# Altium PCB MainPCB.PcbDoc (part 2 of 2)
Units mil, origin at the board's own origin, x right, y up, seen from the top; angles counter-clockwise.
Board outline 4763.78 x 5931.1 mil, 2 copper layers (Top Layer, Bottom Layer); 67 components, 107 nets, 776 pads, 24 vias.
Unrouted connection lines stored in the file: 21.
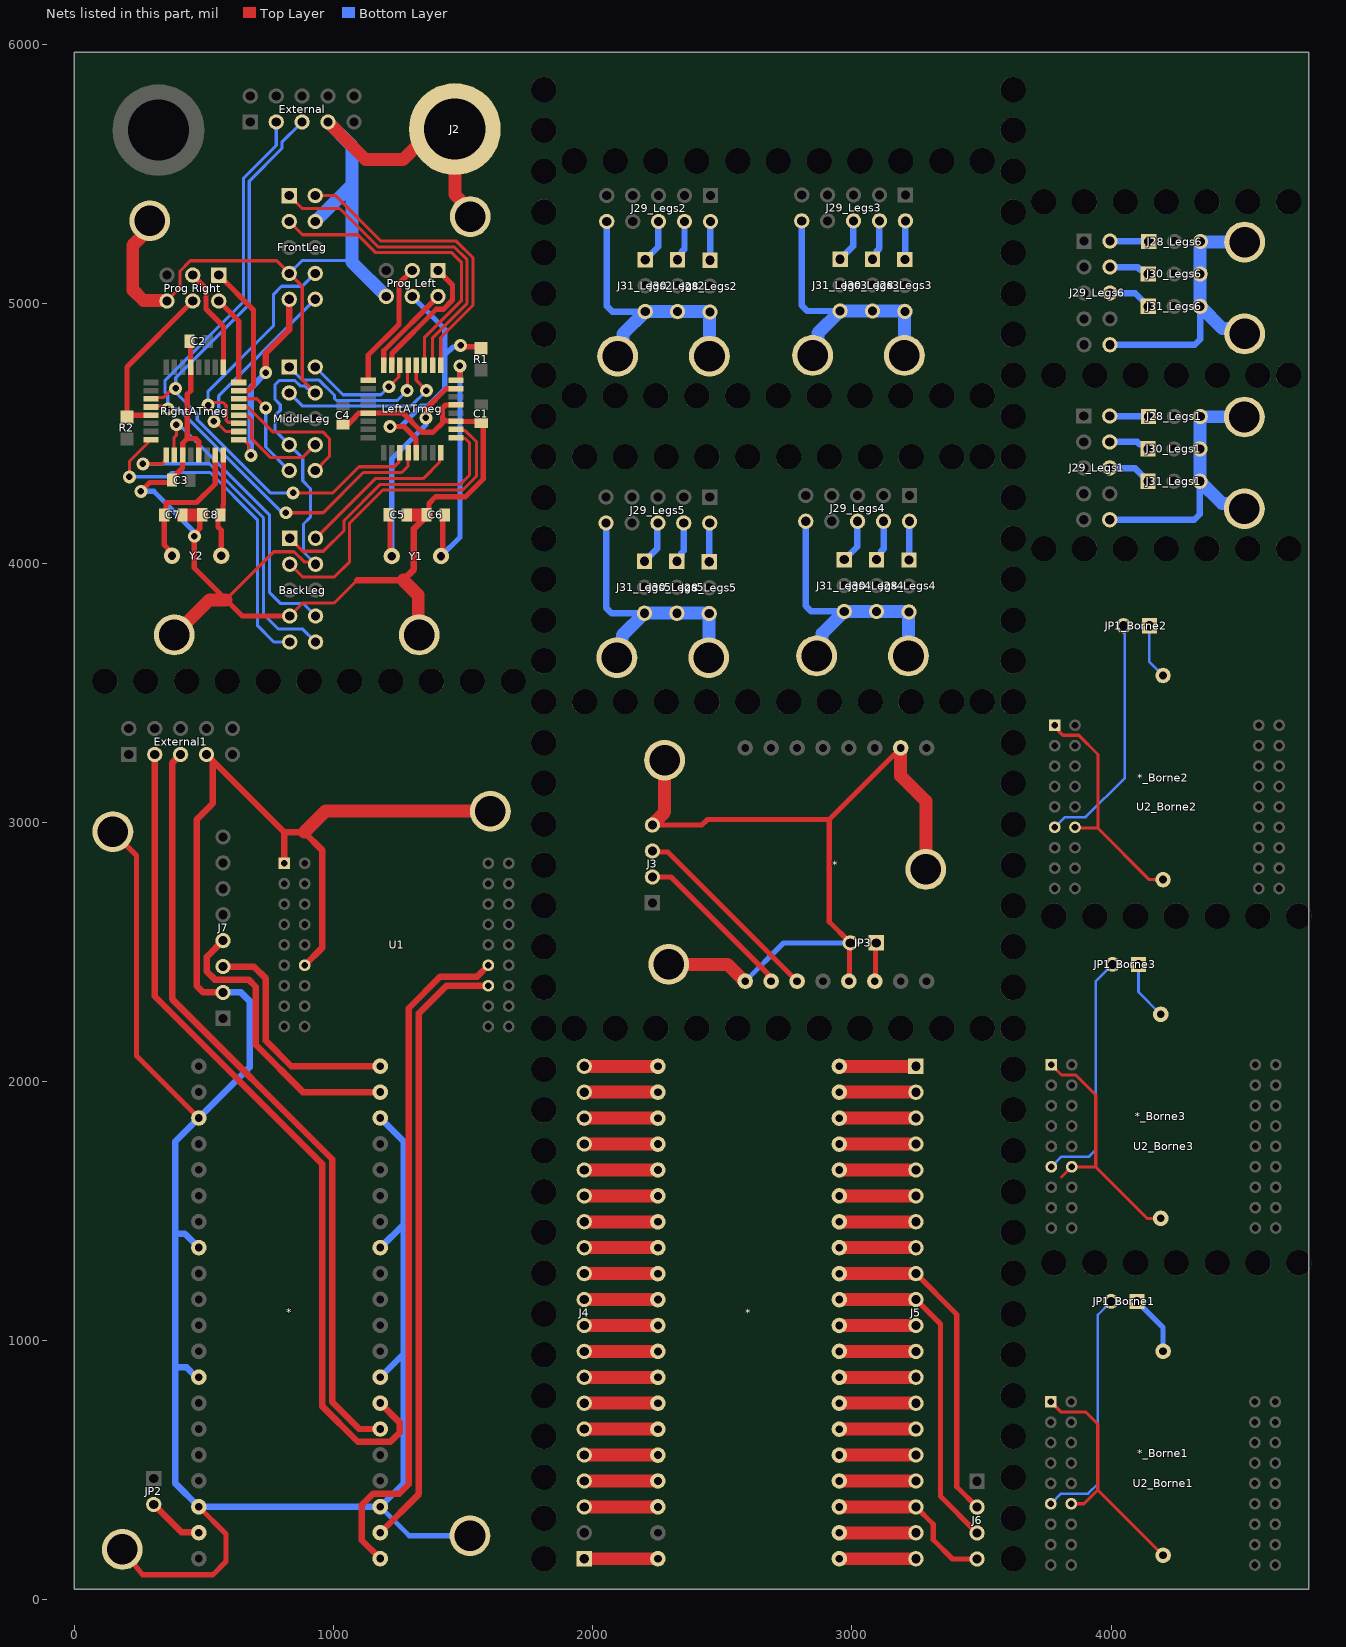
[diagram p2: the nets of this part, all layers, seen from the top]

## Via types
v1: diameter 50, hole 25, Top Layer to Bottom Layer, 24 vias

## Nets (pads, with @x,y where several pads share a name; then routed paths per layer and width w, separated by ;. In a path a pad name is that pad's centre, name@x,y a point inside that pad or via, vN(x,y) a via of type N, cw(c..) or ccw(c..) an arc to the next point about the centre after c; other vN are vias at no path point) (continued)
GND: "Prog Left.6" "Prog Right.6" *.3@1180.31,358.66 *.3@2951.77,358.07 *.4@2988.58,2386.42 *.8@1180.31,858.66 *.8@2588.58,2386.42 *.10@3188.58,3286.42 *.13@1180.31,1358.66 *.18@1180.31,1858.66 *.23@480.31,1858.66 *.28@480.31,1358.66 *.33@480.31,858.66 *.38@480.31,358.66 *_Borne1.2 *_Borne2.2 *_Borne3.2 BackLeg.4 BackLeg.7 C1.1 C2.1 C3.1 C4.1 C5.1 C6.1 C7.1 C8.1 External1.7 External.7 FrontLeg.4 FrontLeg.7 J2.1 J3.4 J5.18 J6.4 J7.2 J28_Legs1.3 J28_Legs2.3 J28_Legs3.3 J28_Legs4.3 J28_Legs5.3 J28_Legs6.3 J29_Legs1.10 J29_Legs2.10 J29_Legs3.10 J29_Legs4.10 J29_Legs5.10 J29_Legs6.10 J30_Legs1.3 J30_Legs2.3 J30_Legs3.3 J30_Legs4.3 J30_Legs5.3 J30_Legs6.3 J31_Legs1.3 J31_Legs2.3 J31_Legs3.3 J31_Legs4.3 J31_Legs5.3 J31_Legs6.3 JP3.2 LeftATmeg.3 LeftATmeg.5 LeftATmeg.21 MiddleLeg.4 MiddleLeg.7 pad.2 RightATmeg.3 RightATmeg.5 RightATmeg.21 U1.1 U1.12 U2_Borne1.1 U2_Borne1.12 U2_Borne2.1 U2_Borne2.12 U2_Borne3.1 U2_Borne3.12 | length 33572.1
  Top Layer w12: pad.2@229.38,5291.78 pad.2@291.34,5291.78 ; 357.09,5010.83 407.87,5061.61 407.87,5126.38 447.83,5166.34 780.67,5166.34 FrontLeg.7@829.53,5117.48 879.33,5067.68 879.33,4706.69 MiddleLeg.4@929.53,4656.5 ; 586.02,3857.28 586.02,3860.24 769.09,4043.31 847.69,4043.31 886.48,4004.51 922.1,4004.51 BackLeg.4@931.1,3995.51 ; BackLeg.7@831.1,3795.51 881.06,3845.47 1002.36,3845.47 1090.94,3934.06 ; pad.2@2293.31,2451.77 pad.2@2321.14,2423.94 ; pad.2@2447.83,3634.84 pad.2@2457.68,3634.84 ; U2_Borne1.1@3751.08,780.43 U2_Borne1.1@3767.72,763.79 3807.82,723.69 3903.29,723.69 3948.82,678.16 3948.82,423.23 ; U2_Borne2.1@3765.84,3390.65 3778.47,3378.03 3778.47,3371.06 3814.15,3335.38 3875.76,3335.38 3949.73,3261.41 3949.73,2976.38 ; U2_Borne3.1@3769.68,2063.98 3809.06,2024.61 3863.7,2024.61 3940.94,1947.36 3940.94,1669.29 ; 3809.06,1630.91 U2_Borne3.12@3848.43,1670.28 3939.96,1670.28 3940.94,1669.29 ; U2_Borne1.12@3846.46,370.09 3895.68,370.09 3948.82,423.23 ; U2_Borne2.12@3857.21,2976.3 3857.21,2977.36 3948.75,2977.36 3949.73,2976.38 ; *_Borne3.2@4191.93,1471.46 4138.78,1471.46 3940.94,1669.29 ; *_Borne2.2@4200.71,2778.54 4147.56,2778.54 3949.73,2976.38 ; *_Borne1.2@4200.79,171.26 3948.82,423.23 ; pad.2@4515.55,4818.7 pad.2@4515.55,4884.08
  Top Layer w20: pad.2@148.62,2963.58 240.16,2872.05 240.16,2098.82 *.23@480.31,1858.66 ; pad.2@185.04,193.9 262.82,96.46 534.45,96.46 585.63,147.64 585.63,253.35 *.38@480.31,358.66 ; v1(256.89,4276.57) 291.17,4310.86 367.72,4310.86 C3.1@376.77,4319.91 376.77,4325.82 417.05,4366.09 417.05,4416.46 RightATmeg.3@417.72,4417.13 418.39,4417.8 418.39,4463.46 435.83,4480.91 ; C2.1@444.09,4855.31 448.54,4850.87 448.54,4756.38 RightATmeg.21@449.21,4755.71 449.21,4664.47 435.83,4651.09 435.83,4480.91 ; RightATmeg.5@480.71,4417.13 480.04,4417.8 480.04,4469.19 468.32,4480.91 435.83,4480.91 ; C8.1@493.87,4186.02 493.47,4185.63 484.18,4176.34 484.18,4132.66 462.99,4111.46 v1(462.99,4103.35) 462.99,3980.32 586.02,3857.28 647.8,3795.51 BackLeg.7@831.1,3795.51 ; C4.1@1036.64,4534.84 1055.91,4534.84 1084.72,4563.66 1084.72,4566.16 1096.44,4577.87 1133.58,4577.87 LeftATmeg.21@1134.25,4578.54 1268.31,4578.54 1341.93,4504.92 1384.25,4504.92 1420.08,4540.75 1420.08,4559.65 ; C6.1@1358.43,4186.02 1368.12,4195.71 1368.12,4229.52 1394.09,4255.5 1509.19,4255.5 1577.57,4323.88 1577.57,4532.44 C1.1@1570.05,4539.96 1563.63,4546.38 1473.5,4546.38 LeftATmeg.3@1472.83,4547.05 1472.17,4547.72 1432.01,4547.72 1420.08,4559.65 ; LeftATmeg.5@1472.83,4610.04 1472.17,4609.37 1431.79,4609.37 1420.08,4597.65 1420.08,4559.65 ; J3.4@2230.31,2988.78 2420.87,2988.78 2442.91,3010.83 2912.99,3010.83 ; *.4@2988.58,2386.42 2991.34,2389.17 2991.34,2537.2 2912.99,2615.55 2912.99,3010.83 ; *.10@3188.58,3286.42 2912.99,3010.83 ; J5.18@3247.05,358.07 3313.98,291.14 3313.98,231.3 3387.99,157.28 J6.4@3483.27,157.28
  Top Layer w25: External1.7@510.04,3261.22 534.45,3236.81 ; J7.2@573.82,2343.11 497.44,2343.11 471.46,2369.09 471.46,3009.25 534.45,3072.24 534.45,3236.81 ; U1.1@810.04,2841.54 810.04,2961.22 ; U1.12@888.78,2447.83 955.71,2514.76 955.71,2892.72 887.2,2961.22 810.04,2961.22 ; 1090.94,3934.06 1269.09,3934.06 1310.43,3975.39 1310.43,4132.12 1358.43,4180.12 C6.1@1358.43,4186.02 ; 534.45,3236.81 810.04,2961.22
  Top Layer w50: pad.2@291.34,5291.78 225.39,5225.84 225.39,5054.13 266.97,5012.56 355.35,5012.56 357.09,5010.83 ; pad.2@385.83,3722.44 520.67,3857.28 586.02,3857.28 ; C7.1@417.72,4185.24 418.11,4185.63 C8.1@493.47,4185.63 ; 887.2,2961.22 968.31,3042.32 pad.2@1605.31,3042.32 ; External.7@978.94,5701.77 1123.62,5557.09 1268.67,5557.09 1385.79,5674.21 J2.1@1468.14,5674.21 1468.14,5422.05 1527.56,5362.63 pad.2@1527.56,5336.61 ; 1269.09,3934.06 1326.97,3876.18 1326.97,3726.18 pad.2@1330.71,3722.44 ; C5.1@1282.28,4185.63 1282.48,4185.83 1358.24,4185.83 C6.1@1358.43,4186.02 ; J3.4@2230.31,2988.78 2230.31,2991.23 2277.56,3038.47 pad.2@2277.56,3239.17 ; pad.2@2293.31,2451.77 2520.52,2451.77 2585.88,2386.42 *.8@2588.58,2386.42 ; *.3@2951.77,358.07 J5.18@3247.05,358.07 ; *.10@3188.58,3286.42 3188.58,3178.54 3285.43,3081.69 pad.2@3285.43,2817.91
  Bottom Layer w12: FrontLeg.7@829.53,5117.48 879.37,5167.32 1065.16,5167.32 1070.87,5161.61 ; MiddleLeg.4@929.53,4656.5 916.79,4656.5 889.58,4683.71 871.2,4683.71 850.49,4704.42 790.45,4704.42 774.02,4687.99 774.02,4631.89 794.69,4611.22 794.69,4589.57 775,4569.88 775,4511.02 MiddleLeg.7@829.53,4456.5 881.3,4404.72 881.3,4316.93 910.83,4287.4 910.83,4177.17 884.25,4150.59 884.25,4042.36 BackLeg.4@931.1,3995.51
  Bottom Layer w20: v1(256.89,4276.57) 306.5,4276.57 v1@457.25,4125.82 ; *.3@1180.31,358.66 1291.93,247.05 pad.2@1526.57,247.05 ; *.8@2588.58,2386.42 2736.61,2534.45 JP3.2@2994.09,2534.45
  Bottom Layer w25: *.33@480.31,858.66 470.84,858.66 432.85,896.65 388.78,896.65 ; *.28@480.31,1358.66 426.57,1412.4 388.78,1412.4 ; J7.2@573.82,2343.11 643.11,2343.11 676.18,2310.04 676.18,2054.53 *.23@480.31,1858.66 388.78,1767.13 388.78,1412.4 ; *.8@1180.31,858.66 1270.67,949.02 ; *.13@1180.31,1358.66 1181.5,1358.66 1270.67,1447.83 ; *.18@1180.31,1858.66 1270.67,1768.31 1270.67,1447.83 ; J29_Legs5.10@2051.55,4154.33 2051.55,3827.76 2072.81,3806.5 J31_Legs5.3@2199.8,3806.5 ; J29_Legs2.10@2054.33,5317.91 2054.33,4991.34 2075.59,4970.08 J31_Legs2.3@2202.59,4970.08 ; J29_Legs3.10@2806.47,5320.28 2806.47,4993.7 2827.73,4972.44 J31_Legs3.3@2954.72,4972.44 ; J29_Legs4.10@2822.21,4160.83 2822.21,3834.25 2843.47,3812.99 J31_Legs4.3@2970.47,3812.99 ; J29_Legs1.10@3995.08,4167.16 4321.65,4167.16 4342.91,4188.41 J31_Legs1.3@4342.91,4315.41 ; J29_Legs6.10@3996.06,4842.13 4322.64,4842.13 4343.9,4863.39 J31_Legs6.3@4343.9,4990.38 ; 388.78,896.65 388.78,1412.4 ; 388.78,896.65 388.78,450.2 *.38@480.31,358.66 *.3@1180.31,358.66 1270.67,449.02 1270.67,949.02 ; 1270.67,949.02 1270.67,1447.83
  Bottom Layer w50: FrontLeg.4@929.53,5317.48 1070.87,5458.82 ; External.7@978.94,5701.77 1070.87,5609.84 1070.87,5458.82 ; 1203.54,5028.94 1070.87,5161.61 1070.87,5458.82 ; pad.2@2093.5,3634.84 2114.07,3655.41 2114.07,3720.76 J31_Legs5.3@2199.8,3806.5 J30_Legs5.3@2324.77,3806.5 2448.17,3806.5 J28_Legs5.3@2449.74,3804.92 2448.79,3803.97 2448.79,3635.8 pad.2@2447.83,3634.84 ; pad.2@2096.29,4798.43 2116.85,4818.99 2116.85,4884.34 J31_Legs2.3@2202.59,4970.08 J30_Legs2.3@2327.56,4970.08 2450.95,4970.08 J28_Legs2.3@2452.53,4968.5 2451.57,4967.55 2451.57,4799.38 pad.2@2450.62,4798.43 ; pad.2@2848.43,4800.79 2868.99,4821.35 2868.99,4886.71 J31_Legs3.3@2954.72,4972.44 J30_Legs3.3@3079.7,4972.44 3203.09,4972.44 J28_Legs3.3@3204.67,4970.87 3203.71,4969.91 3203.71,4801.74 pad.2@3202.76,4800.79 ; pad.2@2864.17,3641.34 2884.74,3661.9 2884.74,3727.26 J31_Legs4.3@2970.47,3812.99 J30_Legs4.3@3095.44,3812.99 3218.84,3812.99 J28_Legs4.3@3220.41,3811.42 3219.46,3810.46 3219.46,3642.29 pad.2@3218.5,3641.34 ; pad.2@4514.57,4209.11 4494,4229.68 4428.65,4229.68 J31_Legs1.3@4342.91,4315.41 J30_Legs1.3@4342.91,4440.38 4342.91,4563.78 J28_Legs1.3@4344.49,4565.35 4345.44,4564.4 4513.61,4564.4 pad.2@4514.57,4563.44 ; pad.2@4515.55,4884.08 4494.99,4904.65 4429.63,4904.65 J31_Legs6.3@4343.9,4990.38 J30_Legs6.3@4343.9,5115.35 4343.9,5238.75 J28_Legs6.3@4345.47,5240.32 4346.43,5239.37 4514.6,5239.37 pad.2@4515.55,5238.42
MISO1: "Prog Left.2" LeftATmeg.16 | length 352.4
  Top Layer w20: LeftATmeg.16@1193.31,4763.58 1193.98,4764.25 1193.98,4819.37 1403.54,5028.94
MISO2: "Prog Right.2" RightATmeg.16 | length 346.1
  Top Layer w20: 557.09,5010.83 634.25,4933.66 RightATmeg.16@634.25,4696.65
MOSI1: "Prog Left.1" LeftATmeg.15 | length 501.9
  Top Layer w20: LeftATmeg.15@1224.8,4763.58 1225.47,4764.25 1225.47,4808.44 1396.44,4979.41 1424.06,4979.41 1459.45,5014.8 1459.45,5073.03 1403.54,5128.94
MOSI2: "Prog Right.1" RightATmeg.15 | length 547
  Top Layer w20: 557.09,5110.83 691.73,4976.18 691.73,4685.5 672.06,4665.83 634.92,4665.83 RightATmeg.15@634.25,4665.16
Net*_1: *.1@2951.77,158.07 J5.20 | length 295.3
  Top Layer w50: *.1@2951.77,158.07 J5.20@3247.05,158.07
Net*_2: *.2@2951.77,258.07 J5.19 | length 295.3
  Top Layer w50: *.2@2951.77,258.07 J5.19@3247.05,258.07
Net*_3: *.3@3088.58,2386.42 JP3.1 | length 150.3
  Top Layer w20: *.3@3088.58,2386.42 3091.34,2389.17 3091.34,2531.69 JP3.1@3094.09,2534.45
Net*_4: *.4@2951.77,458.07 J5.17 | length 295.3
  Top Layer w50: *.4@2951.77,458.07 J5.17@3247.05,458.07
Net*_5: *.5@2951.77,558.07 J5.16 | length 295.3
  Top Layer w50: *.5@2951.77,558.07 J5.16@3247.05,558.07
Net*_6: *.6@2951.77,658.07 J5.15 | length 295.3
  Top Layer w50: *.6@2951.77,658.07 J5.15@3247.05,658.07
Net*_7: *.7@2951.77,758.07 J5.14 | length 295.3
  Top Layer w50: *.7@2951.77,758.07 J5.14@3247.05,758.07
Net*_8: *.8@2951.77,858.07 J5.13 | length 295.3
  Top Layer w50: *.8@2951.77,858.07 J5.13@3247.05,858.07
Net*_9: *.9@2951.77,958.07 J5.12 | length 295.3
  Top Layer w50: *.9@2951.77,958.07 J5.12@3247.05,958.07
Net*_10: *.10@2951.77,1058.07 J5.11 | length 295.3
  Top Layer w50: *.10@2951.77,1058.07 J5.11@3247.05,1058.07
Net*_13: *.13@2951.77,1358.07 J5.8 | length 295.3
  Top Layer w50: *.13@2951.77,1358.07 J5.8@3247.05,1358.07
Net*_14: *.14@2951.77,1458.07 J5.7 | length 295.3
  Top Layer w50: *.14@2951.77,1458.07 J5.7@3247.05,1458.07
Net*_15: *.15@2951.77,1558.07 J5.6 | length 295.3
  Top Layer w50: *.15@2951.77,1558.07 J5.6@3247.05,1558.07
Net*_16: *.16@2951.77,1658.07 J5.5 | length 295.3
  Top Layer w50: *.16@2951.77,1658.07 J5.5@3247.05,1658.07
Net*_17: *.17@2951.77,1758.07 J5.4 | length 295.3
  Top Layer w50: *.17@2951.77,1758.07 J5.4@3247.05,1758.07
Net*_18: *.18@2951.77,1858.07 J5.3 | length 295.3
  Top Layer w50: *.18@2951.77,1858.07 J5.3@3247.05,1858.07
Net*_19: *.19@2951.77,1958.07 J5.2 | length 295.3
  Top Layer w50: *.19@2951.77,1958.07 J5.2@3247.05,1958.07
Net*_20: *.20@2951.77,2058.07 J5.1 | length 295.3
  Top Layer w50: *.20@2951.77,2058.07 J5.1@3247.05,2058.07
Net*_21: *.21@2251.77,2058.07 J4.20 | length 284.3
  Top Layer w50: J4.20@1967.52,2058.07 *.21@2251.77,2058.07
Net*_22: *.22@2251.77,1958.07 J4.19 | length 284.3
  Top Layer w50: J4.19@1967.52,1958.07 *.22@2251.77,1958.07
Net*_23: *.23@2251.77,1858.07 J4.18 | length 290.9
  Top Layer w50: J4.18@1967.52,1858.07 1967.52,1853.35 1972.24,1858.07 *.23@2251.77,1858.07
Net*_24: *.24@2251.77,1758.07 J4.17 | length 284.3
  Top Layer w50: J4.17@1967.52,1758.07 *.24@2251.77,1758.07
Net*_25: *.25@2251.77,1658.07 J4.16 | length 284.3
  Top Layer w50: J4.16@1967.52,1658.07 *.25@2251.77,1658.07
Net*_26: *.26@2251.77,1558.07 J4.15 | length 284.3
  Top Layer w50: J4.15@1967.52,1558.07 *.26@2251.77,1558.07
Net*_27: *.27@2251.77,1458.07 J4.14 | length 284.3
  Top Layer w50: J4.14@1967.52,1458.07 *.27@2251.77,1458.07
Net*_28: *.28@2251.77,1358.07 J4.13 | length 284.3
  Top Layer w50: J4.13@1967.52,1358.07 *.28@2251.77,1358.07
Net*_29: *.29@2251.77,1258.07 J4.12 | length 284.3
  Top Layer w50: J4.12@1967.52,1258.07 *.29@2251.77,1258.07
Net*_30: *.30@2251.77,1158.07 J4.11 | length 284.3
  Top Layer w50: J4.11@1967.52,1158.07 *.30@2251.77,1158.07
Net*_31: *.31@2251.77,1058.07 J4.10 | length 284.3
  Top Layer w50: J4.10@1967.52,1058.07 *.31@2251.77,1058.07
Net*_32: *.32@2251.77,958.07 J4.9 | length 284.3
  Top Layer w50: J4.9@1967.52,958.07 *.32@2251.77,958.07
Net*_33: *.33@2251.77,858.07 J4.8 | length 284.3
  Top Layer w50: J4.8@1967.52,858.07 *.33@2251.77,858.07
Net*_34: *.34@2251.77,758.07 J4.7 | length 284.3
  Top Layer w50: J4.7@1967.52,758.07 *.34@2251.77,758.07
Net*_35: *.35@2251.77,658.07 J4.6 | length 284.3
  Top Layer w50: J4.6@1967.52,658.07 *.35@2251.77,658.07
Net*_36: *.36@2251.77,558.07 J4.5 | length 284.3
  Top Layer w50: J4.5@1967.52,558.07 *.36@2251.77,558.07
Net*_37: *.37@2251.77,458.07 J4.4 | length 284.3
  Top Layer w50: J4.4@1967.52,458.07 *.37@2251.77,458.07
Net*_38: *.38@2251.77,358.07 J4.3 | length 284.3
  Top Layer w50: J4.3@1967.52,358.07 *.38@2251.77,358.07
Net*_39: *.39@480.31,258.66 JP2.2 | length 219.3
  Top Layer w25: JP2.2@306.1,367.52 412.81,260.81 478.17,260.81 *.39@480.31,258.66
Net*_40: *.40@2251.77,158.07 J4.1 | length 284.3
  Top Layer w50: J4.1@1967.52,158.07 *.40@2251.77,158.07
Net*_Borne1_1: *_Borne1.1 JP1_Borne1.1 | length 233.8
  Bottom Layer w20: JP1_Borne1.1@4100.39,1150.84 4200.79,1050.44 *_Borne1.1@4200.79,958.66
Net*_Borne2_1: *_Borne2.1 JP1_Borne2.1 | length 213.9
  Bottom Layer w10: JP1_Borne2.1@4148.23,3758.12 4148.23,3618.43 *_Borne2.1@4200.71,3565.94
Net*_Borne3_1: *_Borne3.1 JP1_Borne3.1 | length 227.8
  Bottom Layer w10: JP1_Borne3.1@4105.91,2451.03 4105.91,2344.88 *_Borne3.1@4191.93,2258.86
NetBackLeg_1: BackLeg.1 LeftATmeg.1 | length 1044.2
  Top Layer w12: BackLeg.1@831.1,4095.51 881.34,4045.28 961.02,4045.28 1040.4,4124.65 1040.4,4163.64 1180.26,4303.5 1489.31,4303.5 1524.7,4338.88 1524.7,4458.96 1524.02,4459.65 1524.02,4464.74 1508.36,4480.4 1476.49,4480.4 LeftATmeg.1@1472.83,4484.06
NetBackLeg_2: BackLeg.2 LeftATmeg.32 | length 637.6
  Top Layer w12: BackLeg.2@931.1,4095.51 1161.09,4325.5 1345.76,4325.5 1409.11,4388.85 1409.11,4420.33 LeftATmeg.32@1413.78,4425
NetBackLeg_3: BackLeg.3 LeftATmeg.2 | length 1221.7
  Top Layer w12: BackLeg.3@831.1,3995.51 880.75,3945.87 1003.35,3945.87 1062.4,4004.92 1062.4,4154.53 1189.37,4281.5 1498.43,4281.5 1551.57,4334.65 1551.57,4468.3 1508.99,4510.88 1477.5,4510.88 LeftATmeg.2@1472.83,4515.55
NetBackLeg_8: BackLeg.8 RightATmeg.2 | length 1138.4
  Top Layer w12: RightATmeg.2@386.22,4417.13 385.24,4418.11 385.24,4484.25 393.7,4492.72 v1(393.7,4533.46)
  Bottom Layer w12: v1(393.7,4533.46) 404.53,4533.46 753.35,4184.65 753.35,3885.83 794.69,3844.49 882.12,3844.49 BackLeg.8@931.1,3795.51
NetBackLeg_9: BackLeg.9 RightATmeg.32 | length 1312.8
  Top Layer w12: v1(212.6,4332.68) 212.6,4393.11 RightATmeg.32@295.67,4476.18
  Bottom Layer w12: v1(212.6,4332.68) 357.28,4332.68 373.72,4349.11 524.1,4349.11 705.99,4167.21 705.99,3759.56 770.04,3695.51 BackLeg.9@831.1,3695.51
NetBackLeg_10: BackLeg.10 RightATmeg.1 | length 1283.7
  Top Layer w12: v1(264.76,4382.87) 339.17,4382.87 354.72,4398.43 RightATmeg.1@354.72,4417.13
  Bottom Layer w12: v1(264.76,4382.87) 521.45,4382.87 729.92,4174.4 729.92,3802.96 787.8,3745.08 881.53,3745.08 BackLeg.10@931.1,3695.51
NetFrontLeg_1: FrontLeg.1 LeftATmeg.10 | length 1249.8
  Top Layer w12: FrontLeg.1@829.53,5417.48 878.9,5368.11 1023.63,5368.11 1171.65,5220.09 1464.96,5220.09 1515.5,5169.55 1515.5,5002.97 1382.28,4869.75 LeftATmeg.10@1382.28,4763.58
NetFrontLeg_2: FrontLeg.2 LeftATmeg.9 | length 1173.2
  Top Layer w12: FrontLeg.2@929.53,5417.48 1008.07,5417.48 1183.46,5242.09 1474.07,5242.09 1537.5,5178.66 1537.5,4993.86 1413.78,4870.14 LeftATmeg.9@1413.78,4763.58
NetFrontLeg_3: FrontLeg.3 LeftATmeg.11 | length 1185
  Top Layer w12: FrontLeg.3@829.53,5317.48 880.28,5266.73 1093.9,5266.73 1162.8,5197.83 1456.1,5197.83 1493.5,5160.43 1493.5,5012.09 1350.79,4869.37 LeftATmeg.11@1350.79,4763.58
NetFrontLeg_8: FrontLeg.8 RightATmeg.11 | length 915.3
  Top Layer w12: v1(516.14,4609.25) 526.97,4609.25 536.81,4619.09 574.21,4619.09 586.02,4607.28 586.02,4550.2 592.91,4543.31 630.12,4543.31 RightATmeg.11@634.25,4539.17
  Bottom Layer w12: v1(516.14,4609.25) 516.14,4663.39 769.09,4916.34 769.09,5037.4 799.61,5067.91 879.96,5067.91 FrontLeg.8@929.53,5117.48
NetFrontLeg_9: FrontLeg.9 RightATmeg.9 | length 761.6
  Top Layer w12: RightATmeg.9@634.25,4476.18 652.95,4476.18 674.23,4454.91 674.23,4422.63 v1(681.5,4415.35)
  Top Layer w25: v1(681.5,4415.35) v1@681.5,4422.12 ; v1(738.58,4734.25) 738.58,4808.99 829.53,4899.94 FrontLeg.9@829.53,5017.48
  Bottom Layer w25: v1(681.5,4415.35) 681.5,4677.17 v1(738.58,4734.25)
NetFrontLeg_10: FrontLeg.10 RightATmeg.10 | length 744.5
  Top Layer w12: v1(538.78,4546.26) 546.26,4546.26 584.84,4507.68 RightATmeg.10@634.25,4507.68
  Bottom Layer w12: v1(538.78,4546.26) 538.78,4573.91 557.14,4592.27 557.14,4645.1 FrontLeg.10@929.53,5017.48
NetJ28_Legs1_1: J28_Legs1.1 J29_Legs1.2 | length 150.2
  Bottom Layer w25: J29_Legs1.2@3995.08,4567.16 3995.98,4566.25 4143.59,4566.25 J28_Legs1.1@4144.49,4565.35
NetJ28_Legs2_1: J28_Legs2.1 J29_Legs2.2 | length 150.2
  Bottom Layer w25: J28_Legs2.1@2452.53,5168.5 2453.43,5169.4 2453.43,5317.01 J29_Legs2.2@2454.33,5317.91
NetJ28_Legs3_1: J28_Legs3.1 J29_Legs3.2 | length 150.2
  Bottom Layer w25: J28_Legs3.1@3204.67,5170.87 3205.57,5171.77 3205.57,5319.38 J29_Legs3.2@3206.47,5320.28
NetJ28_Legs4_1: J28_Legs4.1 J29_Legs4.2 | length 150.2
  Bottom Layer w25: J28_Legs4.1@3220.41,4011.42 3221.31,4012.32 3221.31,4159.93 J29_Legs4.2@3222.21,4160.83
NetJ28_Legs5_1: J28_Legs5.1 J29_Legs5.2 | length 150.2
  Bottom Layer w25: J28_Legs5.1@2449.74,4004.92 2450.64,4005.82 2450.64,4153.43 J29_Legs5.2@2451.55,4154.33
NetJ28_Legs6_1: J28_Legs6.1 J29_Legs6.2 | length 150.2
  Bottom Layer w25: J29_Legs6.2@3996.06,5242.13 3996.96,5241.23 4144.57,5241.23 J28_Legs6.1@4145.47,5240.32
NetJ29_Legs1_4: J29_Legs1.4 J30_Legs1.1 | length 158.9
  Bottom Layer w25: J29_Legs1.4@3995.08,4467.16 4101.48,4467.16 4111.22,4457.41 4125.89,4457.41 J30_Legs1.1@4142.91,4440.38
NetJ29_Legs1_6: J29_Legs1.6 J31_Legs1.1 | length 169.3
  Bottom Layer w25: J29_Legs1.6@3995.08,4367.16 3996.65,4365.58 4092.75,4365.58 J31_Legs1.1@4142.91,4315.41
NetJ29_Legs2_4: J29_Legs2.4 J30_Legs2.1 | length 158.9
  Bottom Layer w25: J30_Legs2.1@2327.56,5170.08 2344.59,5187.11 2344.59,5201.77 2354.33,5211.52 J29_Legs2.4@2354.33,5317.91
NetJ29_Legs2_6: J29_Legs2.6 J31_Legs2.1 | length 169.3
  Bottom Layer w25: J31_Legs2.1@2202.59,5170.08 2252.76,5220.25 2252.76,5316.34 J29_Legs2.6@2254.33,5317.91
NetJ29_Legs3_4: J29_Legs3.4 J30_Legs3.1 | length 158.9
  Bottom Layer w25: J30_Legs3.1@3079.7,5172.44 3096.72,5189.47 3096.72,5204.13 3106.47,5213.88 J29_Legs3.4@3106.47,5320.28
NetJ29_Legs3_6: J29_Legs3.6 J31_Legs3.1 | length 169.3
  Bottom Layer w25: J31_Legs3.1@2954.72,5172.44 3004.89,5222.61 3004.89,5318.7 J29_Legs3.6@3006.47,5320.28
NetJ29_Legs4_4: J29_Legs4.4 J30_Legs4.1 | length 158.9
  Bottom Layer w25: J30_Legs4.1@3095.44,4012.99 3112.47,4030.02 3112.47,4044.69 3122.21,4054.43 J29_Legs4.4@3122.21,4160.83
NetJ29_Legs4_6: J29_Legs4.6 J31_Legs4.1 | length 169.3
  Bottom Layer w25: J31_Legs4.1@2970.47,4012.99 3020.64,4063.16 3020.64,4159.25 J29_Legs4.6@3022.21,4160.83
NetJ29_Legs5_4: J29_Legs5.4 J30_Legs5.1 | length 158.9
  Bottom Layer w25: J30_Legs5.1@2324.77,4006.5 2341.8,4023.52 2341.8,4038.19 2351.55,4047.93 J29_Legs5.4@2351.55,4154.33
NetJ29_Legs5_6: J29_Legs5.6 J31_Legs5.1 | length 169.3
  Bottom Layer w25: J31_Legs5.1@2199.8,4006.5 2249.97,4056.66 2249.97,4152.76 J29_Legs5.6@2251.55,4154.33
NetJ29_Legs6_4: J29_Legs6.4 J30_Legs6.1 | length 158.9
  Bottom Layer w25: J29_Legs6.4@3996.06,5142.13 4102.46,5142.13 4112.2,5132.38 4126.87,5132.38 J30_Legs6.1@4143.9,5115.35
NetJ29_Legs6_6: J29_Legs6.6 J31_Legs6.1 | length 169.3
  Bottom Layer w25: J29_Legs6.6@3996.06,5042.13 3997.64,5040.55 4093.73,5040.55 J31_Legs6.1@4143.9,4990.38
NetJP1_Borne1_2: JP1_Borne1.2 U2_Borne1.11 | length 938.2
  Bottom Layer w10: U2_Borne1.11@3767.72,370.09 3807.09,409.46 3911.42,409.46 3948.82,446.86 3948.82,1099.26 JP1_Borne1.2@4000.39,1150.84
NetJP1_Borne2_2: JP1_Borne2.2 U2_Borne2.11 | length 931.7
  Bottom Layer w10: U2_Borne2.11@3782.48,2980.31 3821.85,3019.68 3901.57,3019.68 4053.15,3171.26 JP1_Borne2.2@4053.15,3753.2
NetJP1_Borne3_2: JP1_Borne3.2 U2_Borne3.11 | length 940.9
  Bottom Layer w10: U2_Borne3.11@3769.68,1670.28 3809.06,1709.65 3915.35,1709.65 3940.94,1735.24 3940.94,2386.07 JP1_Borne3.2@4005.91,2451.03
NetLeftATmeg_12: LeftATmeg.12 MiddleLeg.3 | length 689.7
  Top Layer w12: LeftATmeg.12@1319.29,4763.58 1319.29,4704.72 v1(1358.66,4665.35)
  Bottom Layer w12: MiddleLeg.3@829.53,4656.5 880.71,4605.31 1298.62,4605.31 v1(1358.66,4665.35)
NetLeftATmeg_13: LeftATmeg.13 MiddleLeg.1 | length 630.3
  Top Layer w12: v1(1283.86,4665.35) 1285.83,4667.32 1285.83,4761.61 LeftATmeg.13@1287.8,4763.58
  Bottom Layer w12: MiddleLeg.1@829.53,4756.5 880.31,4705.71 944.7,4705.71 1004.33,4646.08 1004.33,4634.34 1011.36,4627.31 1245.82,4627.31 v1(1283.86,4665.35)
NetLeftATmeg_14: LeftATmeg.14 MiddleLeg.2 | length 442.6
  Top Layer w12: v1(1213.98,4680.12) 1251.63,4717.77 1251.63,4758.91 LeftATmeg.14@1256.3,4763.58
  Bottom Layer w12: MiddleLeg.2@929.53,4756.5 1036.71,4649.31 1183.17,4649.31 v1(1213.98,4680.12)
NetMiddleLeg_8: MiddleLeg.8 RightATmeg.12 | length 426.5
  Top Layer w12: RightATmeg.12@634.25,4570.67 638.92,4566 670.41,4566 684.45,4551.96 684.45,4479.33 757.28,4406.5 879.53,4406.5 MiddleLeg.8@929.53,4456.5
NetMiddleLeg_9: MiddleLeg.9 RightATmeg.14 | length 398.5
  Top Layer w12: RightATmeg.14@634.25,4633.66 703.35,4633.66 v1(738.58,4598.43)
  Bottom Layer w12: v1(738.58,4598.43) 738.58,4447.44 MiddleLeg.9@829.53,4356.5
NetMiddleLeg_10: MiddleLeg.10 RightATmeg.13 | length 546.9
  Top Layer w12: RightATmeg.13@634.25,4602.17 668.9,4602.17 765.16,4505.91 958.07,4505.91 984.65,4479.33 984.65,4411.61 MiddleLeg.10@929.53,4356.5
OSC11: C5.2 LeftATmeg.7 Y1.1 | length 935.8
  Top Layer w20: C5.2@1211.81,4186.02 1218.31,4179.53 1218.31,4033.07 Y1.1@1224.8,4026.57 ; v1(1356.69,4560.04) 1356.69,4594.03 1435.02,4672.36 1472.17,4672.36 LeftATmeg.7@1472.83,4673.03
  Bottom Layer w20: Y1.1@1224.8,4026.57 1224.8,4401.47 1356.69,4533.36 v1(1356.69,4560.04)
OSC12: C6.2 LeftATmeg.8 Y1.2 | length 1000.3
  Top Layer w20: Y1.2@1414.8,4026.57 1421.86,4033.63 1421.86,4178.58 C6.2@1428.91,4185.63 ; LeftATmeg.8@1472.83,4704.53 1472.93,4704.63 1487.6,4704.63 v1(1487.6,4760.83)
  Bottom Layer w20: Y1.2@1414.8,4026.57 1487.6,4099.37 v1(1487.6,4760.83)
OSC21: C7.2 RightATmeg.7 Y2.1 | length 551.6
  Top Layer w20: Y2.1@376.77,4028.15 376.77,4039.79 347.24,4069.31 C7.2@347.24,4185.63 353.62,4192.01 353.62,4232.97 471.45,4232.97 543.7,4305.22 RightATmeg.7@543.7,4417.13
OSC22: C8.2 RightATmeg.8 Y2.2 | length 402.5
  Top Layer w20: Y2.2@566.77,4028.15 566.77,4126.35 554.66,4138.46 554.66,4175.94 C8.2@564.34,4185.63 573.62,4194.91 573.62,4225 575.2,4226.57 RightATmeg.8@575.2,4417.13
Reset1: "Prog Left.4" LeftATmeg.29 R1.2 | length 1006.7
  Top Layer w20: v1(1218.5,4526.57) 1272.21,4526.57 1318.62,4480.17 1318.62,4425.67 LeftATmeg.29@1319.29,4425 ; v1@1496.29,4833.83 1496.62,4834.15 1563.88,4834.15 R1.2@1569.29,4828.74
  Bottom Layer w20: v1(1218.5,4526.57) 1259.59,4526.57 1338.05,4605.04 1361.99,4605.04 1429.53,4672.58 1429.53,4802.17 ; 1303.54,5028.94 1429.53,4902.95 1429.53,4802.17 ; v1(1490.55,4839.57) 1484.81,4833.83 1461.19,4833.83 1429.53,4802.17
Reset2: "Prog Right.4" R2.2 RightATmeg.29 | length 648.5
  Top Layer w20: RightATmeg.29@295.67,4570.67 295,4570 209.6,4570 R2.2@202.93,4563.33 202.93,4756.68 457.09,5010.83
RX_BLE: *.1@1180.31,158.66 U1.25 | length 2663
  Top Layer w25: *.1@1180.31,158.66 1109.25,229.72 1109.25,365.16 1152.56,408.46 1253.48,408.46 1290.35,445.34 1290.35,2282.48 1412.4,2404.53 1554.13,2404.53 U1.25@1597.44,2447.83
RX_ESP: *.6@2788.58,2386.42 J3.3 | length 766.4
  Top Layer w20: J3.3@2230.31,2888.78 2233.94,2885.16 2289.84,2885.16 *.6@2788.58,2386.42
RX_Shield: *.12@2951.77,1258.07 J5.9 J6.2 | length 1293.9
  Top Layer w20: J5.9@3247.05,1258.07 3404.53,1100.59 3404.53,436.02 J6.2@3483.27,357.28
  Top Layer w50: *.12@2951.77,1258.07 J5.9@3247.05,1258.07
SCK1: "Prog Left.3" LeftATmeg.17 | length 494.5
  Top Layer w20: LeftATmeg.17@1134.25,4704.53 1134.25,4802.07 1253.07,4920.89 1253.07,5078.46 1303.54,5128.94
SCK2: "Prog Right.3" RightATmeg.17 | length 404
  Top Layer w20: 457.09,5110.83 507.56,5060.35 507.56,4980.04 575.2,4912.4 RightATmeg.17@575.2,4755.71
SCL: External.3 LeftATmeg.28 RightATmeg.28 | length 2579.9
  Top Layer w12: RightATmeg.28@295.67,4602.17 299.21,4605.71 348.43,4605.71 v1(360.63,4593.5) ; v1(816.34,4193.9) 959.83,4193.9 1115.34,4349.41 1263.05,4349.41 1287.8,4374.16 LeftATmeg.28@1287.8,4425
  Bottom Layer w12: External.3@778.94,5701.77 778.94,5611.22 652.95,5485.24 652.95,5007.87 350.14,4705.06 350.14,4657.23 360.63,4646.74 v1(360.63,4593.5) 402.84,4593.5 802.45,4193.9 v1(816.34,4193.9)
SCL_E: *.7@1180.31,758.66 External1.3 | length 3297.5
  Top Layer w25: External1.3@310.04,3261.22 310.04,2328.28 955.71,1682.61 955.71,747.05 1093.5,609.25 1219.49,609.25 1254.92,644.68 1254.92,684.05 *.7@1180.31,758.66
SCL_G: *.20@1180.31,2058.66 J7.3 | length 906.4
  Top Layer w25: J7.3@573.82,2443.11 692.72,2443.11 739.17,2396.65 739.17,2156.5 837.01,2058.66 *.20@1180.31,2058.66
SDA: External.5 LeftATmeg.27 RightATmeg.27 | length 2479
  Top Layer w12: RightATmeg.27@295.67,4633.66 300,4637.99 343.2,4637.99 379.42,4674.21 v1(391.14,4674.21) ; v1(843.9,4270.67) 997.79,4270.67 1098.53,4371.41 1234.19,4371.41 1251.63,4388.85 1251.63,4420.33 LeftATmeg.27@1256.3,4425
  Bottom Layer w12: v1(843.9,4270.67) 756.39,4270.67 474.12,4552.94 474.12,4575.08 391.14,4658.05 v1(391.14,4674.21) 391.14,4714.95 674.95,4998.76 674.95,5473.43 800.94,5599.41 800.94,5623.77 External.5@878.94,5701.77
SDA_E: *.6@1180.31,658.66 External1.5 | length 2996.5
  Top Layer w25: External1.5@410.04,3261.22 376.97,3228.15 376.97,2317.91 995.08,1699.8 995.08,762.79 1099.21,658.66 *.6@1180.31,658.66
SDA_G: *.19@1180.31,1958.66 J7.4 | length 1138.8
  Top Layer w25: J7.4@573.82,2543.11 510.83,2480.12 510.83,2424.21 542.32,2392.72 672.24,2392.72 699.8,2365.16 699.8,2140.75 881.89,1958.66 *.19@1180.31,1958.66
TX_BLE: *.2@1180.31,258.66 U1.23 | length 2377.8
  Top Layer w25: *.2@1180.31,258.66 1329.72,408.07 1329.72,2262.8 1436.02,2369.09 U1.23@1597.44,2369.09
TX_ESP: *.7@2688.58,2386.42 J3.2 | length 634.6
  Top Layer w20: J3.2@2230.31,2788.78 2302.76,2788.78 2688.58,2402.95 *.7@2688.58,2386.42
TX_Shield: *.11@2951.77,1158.07 J5.10 J6.3 | length 1293.9
  Top Layer w20: J5.10@3247.05,1158.07 3341.54,1063.58 3341.54,399.02 J6.3@3483.27,257.28
  Top Layer w50: *.11@2951.77,1158.07 J5.10@3247.05,1158.07
pads on no net: *.1@3288.58,2386.42 *.2@3188.58,2386.42 *.4@1180.31,458.66 *.5@1180.31,558.66 *.5@2888.58,2386.42 *.9@1180.31,958.66 *.10@1180.31,1058.66 *.11@1180.31,1158.66 *.11@3088.58,3286.42 *.12@1180.31,1258.66 *.12@2988.58,3286.42 *.13@2888.58,3286.42 *.14@1180.31,1458.66 *.14@2788.58,3286.42 *.15@1180.31,1558.66 *.15@2688.58,3286.42 *.16@1180.31,1658.66 *.16@2588.58,3286.42 *.17@1180.31,1758.66 *.21@480.31,2058.66 *.22@480.31,1958.66 *.24@480.31,1758.66 *.25@480.31,1658.66 *.26@480.31,1558.66 *.27@480.31,1458.66 *.29@480.31,1258.66 *.30@480.31,1158.66 *.31@480.31,1058.66 *.32@480.31,958.66 *.34@480.31,758.66 *.35@480.31,658.66 *.37@480.31,458.66 *.40@480.31,158.66 External1.2 External1.4 External1.6 External1.8 External1.9 External1.10 External.2 External.4 External.6 External.8 External.9 External.10 J7.5 J7.6 J7.7 J7.8 J29_Legs1.1 J29_Legs1.3 J29_Legs1.5 J29_Legs1.7 J29_Legs1.9 J29_Legs2.1 J29_Legs2.3 J29_Legs2.5 J29_Legs2.7 J29_Legs2.9 J29_Legs3.1 J29_Legs3.3 J29_Legs3.5 J29_Legs3.7 J29_Legs3.9 J29_Legs4.1 J29_Legs4.3 J29_Legs4.5 J29_Legs4.7 J29_Legs4.9 J29_Legs5.1 J29_Legs5.3 J29_Legs5.5 J29_Legs5.7 J29_Legs5.9 J29_Legs6.1 J29_Legs6.3 J29_Legs6.5 J29_Legs6.7 J29_Legs6.9 LeftATmeg.19 LeftATmeg.20 LeftATmeg.22 LeftATmeg.23 LeftATmeg.24 LeftATmeg.25 LeftATmeg.26 LeftATmeg.30 LeftATmeg.31 RightATmeg.19 RightATmeg.20 RightATmeg.22 RightATmeg.23 RightATmeg.24 RightATmeg.25 RightATmeg.26 RightATmeg.30 RightATmeg.31 U1.2 U1.3 U1.4 U1.5 U1.6 U1.7 U1.8 U1.9 U1.10 U1.13 U1.14 U1.15 U1.16 U1.17 U1.18 U1.19 U1.20 U1.21 U1.22 U1.24 U1.26 U1.27 U1.28 U1.29 U1.30 U1.31 U1.32 U1.33 U1.34 U1.35 U1.36 U2_Borne1.2 U2_Borne1.3 U2_Borne1.4 U2_Borne1.5 U2_Borne1.6 U2_Borne1.7 U2_Borne1.8 U2_Borne1.9 U2_Borne1.10 U2_Borne1.13 U2_Borne1.14 U2_Borne1.15 U2_Borne1.16 U2_Borne1.17 U2_Borne1.18 U2_Borne1.19 U2_Borne1.20 U2_Borne1.21 U2_Borne1.22 U2_Borne1.23 U2_Borne1.24 U2_Borne1.25 U2_Borne1.26 U2_Borne1.27 U2_Borne1.28 U2_Borne1.29 U2_Borne1.30 U2_Borne1.31 U2_Borne1.32 U2_Borne1.33 U2_Borne1.34 U2_Borne1.35 U2_Borne1.36 U2_Borne2.2 U2_Borne2.3 U2_Borne2.4 U2_Borne2.5 U2_Borne2.6 U2_Borne2.7 U2_Borne2.8 U2_Borne2.9 U2_Borne2.10 U2_Borne2.13 U2_Borne2.14 U2_Borne2.15 U2_Borne2.16 U2_Borne2.17 U2_Borne2.18 U2_Borne2.19 U2_Borne2.20 U2_Borne2.21 U2_Borne2.22 U2_Borne2.23 U2_Borne2.24 U2_Borne2.25 U2_Borne2.26 U2_Borne2.27 U2_Borne2.28 U2_Borne2.29 U2_Borne2.30 U2_Borne2.31 U2_Borne2.32 U2_Borne2.33 U2_Borne2.34 U2_Borne2.35 U2_Borne2.36 U2_Borne3.2 U2_Borne3.3 U2_Borne3.4 U2_Borne3.5 U2_Borne3.6 U2_Borne3.7 U2_Borne3.8 U2_Borne3.9 U2_Borne3.10 U2_Borne3.13 U2_Borne3.14 U2_Borne3.15 U2_Borne3.16 U2_Borne3.17 U2_Borne3.18 U2_Borne3.19 U2_Borne3.20 U2_Borne3.21 U2_Borne3.22 U2_Borne3.23 U2_Borne3.24 U2_Borne3.25 U2_Borne3.26 U2_Borne3.27 U2_Borne3.28 U2_Borne3.29 U2_Borne3.30 U2_Borne3.31 U2_Borne3.32 U2_Borne3.33 U2_Borne3.34 U2_Borne3.35 U2_Borne3.36

## Silkscreen, mask and mechanical layers (free items; w line width, h text height)
Top Overlay:
  circle w10: c1461.61,4440.94 r7.69
  circle w10: c308.07,4432.09 r8.47
  text "SCL" at 748.03,5643.7 h50 r270
  text "SDA" at 842.52,5643.7 h50 r270
  text "GND" at 944.88,5643.7 h50 r270
  text "5v" at 657.48,5639.76 h50 r270
  text "GND" at 1417.32,5458.66 h60 r180
  text "5v" at 503.94,5449.8 h60 r180
  text "Born 1" at 4040.35,3053.15 h60
  text "Born 2" at 4045.28,1765.75 h60
  text "Born 3" at 4036.42,531.5 h60
  text "Shield UART 1" at 2605.32,491.14 h60 r90
  text "Carte Bluetooth Et SPI motor" at 853.35,290.35 h60 r90
Drill Drawing:
  circle w10: c312.43,8359.04 r33.33
  lines w10: 279.1,8509.04 312.43,8475.71 345.76,8509.04 312.43,8542.38 279.1,8509.04 ; 279.1,8625.71 345.76,8625.71 345.76,8692.38 279.1,8692.38 279.1,8625.71 ; 279.1,8792.38 295.76,8792.38 295.76,8775.71 329.1,8775.71 329.1,8792.38 345.76,8792.38 345.76,8825.71 329.1,8825.71 329.1,8842.38 295.76,8842.38 295.76,8825.71 279.1,8825.71 279.1,8792.38 ; 279.1,8942.38 295.76,8942.38 312.43,8925.71 329.1,8942.38 345.76,8942.38 329.1,8959.04 345.76,8975.71 329.1,8975.71 312.43,8992.38 295.76,8975.71 279.1,8975.71 295.76,8959.04 279.1,8942.38 ; 279.1,9075.71 279.1,9092.38 295.76,9109.04 279.1,9125.71 279.1,9142.38 295.76,9142.38 312.43,9125.71 329.1,9142.38 345.76,9142.38 345.76,9125.71 329.1,9109.04 345.76,9092.38 345.76,9075.71 329.1,9075.71 312.43,9092.38 295.76,9075.71 279.1,9075.71 ; 279.1,9292.38 345.76,9292.38 312.43,9225.71 279.1,9292.38 ; 279.1,9375.71 312.43,9392.38 345.76,9375.71 329.1,9409.04 345.76,9442.38 312.43,9425.71 279.1,9442.38 295.76,9409.04 279.1,9375.71
  lines w15: 219.3,8280.71 10810.37,8280.71 ; 219.3,9480.71 10810.37,9480.71 ; 770.18,8130.71 770.18,9630.71 ; 1360.02,8130.71 1360.02,9630.71 ; 2519.68,8130.71 2519.68,9630.71 ; 3025.56,8130.71 3025.56,9630.71 ; 3759.36,8130.71 3759.36,9630.71 ; 5258.91,8130.71 5258.91,9630.71 ; 5848.76,8130.71 5848.76,9630.71 ; 6594.56,8130.71 6594.56,9630.71 ; 7244.39,8130.71 7244.39,9630.71 ; 8098.15,8130.71 8098.15,9630.71 ; 9431.76,8130.71 9431.76,9630.71 ; 219.3,8130.71 10810.37,8130.71 10810.37,9630.71 219.3,9630.71 219.3,8130.71
  text "Symbol" at 309.3,9525.71 h72
  text "Count" at 815.18,9525.71 h72
  text "Hole Size" at 1405.02,9525.71 h72
  text "Plated" at 2564.68,9525.71 h72
  text "Hole Type" at 3070.56,9525.71 h72
  text "Drill Layer Pair" at 3804.36,9525.71 h72
  text "Via/Pad" at 5303.91,9525.71 h72
  text "Pad Shape" at 5893.76,9525.71 h72
  text "Template" at 6639.56,9525.71 h72
  text "Description" at 7289.39,9525.71 h72
  text "Hole Tolerance (+)" at 8143.15,9525.71 h72
  text "Hole Tolerance (-)" at 9476.76,9525.71 h72
  text "2" at 815.18,9375.71 h60
  text "236.22mil (6.000mm)" at 1405.02,9375.71 h60
  text "PTH" at 2564.68,9375.71 h60
  text "Round" at 3070.56,9375.71 h60
  text "Top Layer - Bottom Layer" at 3804.36,9375.71 h60
  text "Pad" at 5303.91,9375.71 h60
  text "Rounded" at 5893.76,9375.71 h60
  text "c900h600" at 6639.56,9375.71 h60
  text "4" at 815.18,9225.71 h60
  text "32.00mil (0.813mm)" at 1405.02,9225.71 h60
  text "PTH" at 2564.68,9225.71 h60
  text "Round" at 3070.56,9225.71 h60
  text "Top Layer - Bottom Layer" at 3804.36,9225.71 h60
  text "Pad" at 5303.91,9225.71 h60
  text "Rounded" at 5893.76,9225.71 h60
  text "c160h81" at 6639.56,9225.71 h60
  text "23" at 815.18,9075.71 h60
  text "118.11mil (3.000mm)" at 1405.02,9075.71 h60
  text "PTH" at 2564.68,9075.71 h60
  text "Round" at 3070.56,9075.71 h60
  text "Top Layer - Bottom Layer" at 3804.36,9075.71 h60
  text "Pad" at 5303.91,9075.71 h60
  text "Rounded" at 5893.76,9075.71 h60
  text "c400h300" at 6639.56,9075.71 h60
  text "24" at 815.18,8925.71 h60
  text "25.00mil (0.635mm)" at 1405.02,8925.71 h60
  text "PTH" at 2564.68,8925.71 h60
  text "Round" at 3070.56,8925.71 h60
  text "Top Layer - Bottom Layer" at 3804.36,8925.71 h60
  text "Via" at 5303.91,8925.71 h60
  text "Rounded" at 5893.76,8925.71 h60
  text "v127h64" at 6639.56,8925.71 h60
  text "102" at 815.18,8775.71 h60
  text "30.00mil (0.762mm)" at 1405.02,8775.71 h60
  text "PTH" at 2564.68,8775.71 h60
  text "Round" at 3070.56,8775.71 h60
  text "Top Layer - Bottom Layer" at 3804.36,8775.71 h60
  text "Pad" at 5303.91,8775.71 h60
  text "Rounded" at 5893.76,8775.71 h60
  text "c152h76" at 6639.56,8775.71 h60
  text "144" at 815.18,8625.71 h60
  text "25.59mil (0.650mm)" at 1405.02,8625.71 h60
  text "PTH" at 2564.68,8625.71 h60
  text "Round" at 3070.56,8625.71 h60
  text "Top Layer - Bottom Layer" at 3804.36,8625.71 h60
  text "Pad" at 5303.91,8625.71 h60
  text "(Mixed)" at 5893.76,8625.71 h60
  text "(Mixed)" at 6639.56,8625.71 h60
  text "175" at 815.18,8475.71 h60
  text "98.43mil (2.500mm)" at 1405.02,8475.71 h60
  text "PTH" at 2564.68,8475.71 h60
  text "Round" at 3070.56,8475.71 h60
  text "Top Layer - Bottom Layer" at 3804.36,8475.71 h60
  text "Pad" at 5303.91,8475.71 h60
  text "Rounded" at 5893.76,8475.71 h60
  text "c250h250" at 6639.56,8475.71 h60
  text "242" at 815.18,8325.71 h60
  text "35.43mil (0.900mm)" at 1405.02,8325.71 h60
  text "PTH" at 2564.68,8325.71 h60
  text "Round" at 3070.56,8325.71 h60
  text "Top Layer - Bottom Layer" at 3804.36,8325.71 h60
  text "Pad" at 5303.91,8325.71 h60
  text "(Mixed)" at 5893.76,8325.71 h60
  text "(Mixed)" at 6639.56,8325.71 h60
  text "716 Total" at 815.18,8175.71 h60

## Text inside footprints (layer, text, board x,y; h text height)
*: Top Overlay "Antenne" at 2168.11,2640.75 h60 r90
External: Top Overlay "10" at 1138.94,5781.77 h50; Top Overlay "9" at 1138.94,5681.77 h50; Top Overlay "1" at 598.94,5681.77 h50; Top Overlay "2" at 578.94,5781.77 h50
External1: Top Overlay "10" at 670.04,3341.22 h50; Top Overlay "9" at 670.04,3241.22 h50; Top Overlay "1" at 130.04,3241.22 h50; Top Overlay "2" at 110.04,3341.22 h50
"Prog Left": Top Overlay "6" at 1143.54,5048.94 h50 r180; Top Overlay "5" at 1143.54,5148.94 h50 r180; Top Overlay "2" at 1503.54,5048.94 h50 r180; Top Overlay "1" at 1483.54,5148.94 h50 r180
"Prog Right": Top Overlay "6" at 297.09,5030.83 h50 r180; Top Overlay "5" at 297.09,5130.83 h50 r180; Top Overlay "2" at 657.09,5030.83 h50 r180; Top Overlay "1" at 637.09,5130.83 h50 r180
U1: Top Overlay "ANT" at 1160.67,3262.24 h60
U2_Borne1: Top Overlay "ANT" at 4118.35,1184.5 h60
U2_Borne2: Top Overlay "ANT" at 4133.11,3794.72 h60
U2_Borne3: Top Overlay "ANT" at 4120.31,2484.68 h60